# EAGLE board dev (EAGLE 4.16)

Size 100 x 48.25 mm. Coordinates in mm from the lower left corner, seen from the top.
Outline: 0,0 100,0 100,48.25 0,48.25 0,0
Copper layers (1*16): Top 0.035mm / dielectric 1.5mm / Bottom 0.035mm
Design rules "8mils": minimum track width 10mil, minimum drill 24mil, track to track 8mil, track to pad 8mil, pad to pad 8mil, via to via 8mil, smd to smd 8mil, copper to edge 40mil, drill to drill 10mil, minimum pad ring 10mil, minimum via ring 8mil, stop-mask expansion 0mil, vias tented up to drill 0mil, thermal gap 10mil

## Footprints (pad centres in the part's own frame; a part is rotated, then mirrored left to right if it is on the bottom)
SOT223 = smd 1.219 x 2.235: 1 -2.311,-3.099; 2 0,-3.099; 3 2.311,-3.099 | smd 3.6 x 2.2: 4 0,3.099
C0603 = smd 1.1 x 1: 1 -0.85,0; 2 0.85,0
C1206 = smd 1.6 x 1.8: 1 -1.4,0; 2 1.4,0
SOD80C = smd 1.4 x 1.8: A 1.7,0; C -1.7,0
TQFP32-08 = smd 1.27 x 0.559: 1 -4.293,2.8; 2 -4.293,2; 3 -4.293,1.2; 4 -4.293,0.4; 5 -4.293,-0.4; 6 -4.293,-1.2; 7 -4.293,-2; 8 -4.293,-2.8; 17 4.293,-2.8; 18 4.293,-2; 19 4.293,-1.2; 20 4.293,-0.4; 21 4.293,0.4; 22 4.293,1.2; 23 4.293,2; 24 4.293,2.8 | smd 0.559 x 1.27: 9 -2.8,-4.293; 10 -2,-4.293; 11 -1.2,-4.293; 12 -0.4,-4.293; 13 0.4,-4.293; 14 1.2,-4.293; 15 2,-4.293; 16 2.8,-4.293; 25 2.8,4.293; 26 2,4.293; 27 1.2,4.293; 28 0.4,4.293; 29 -0.4,4.293; 30 -1.2,4.293; 31 -2,4.293; 32 -2.8,4.293
SOICW54 = smd 0.3 x 2: 1 0.5,-1.1; 2 1.15,-1.1; 3 1.8,-1.1; 4 2.45,-1.1; 5 3.1,-1.1; 6 3.75,-1.1; 7 4.4,-1.1; 8 5.05,-1.1; 9 5.7,-1.1; 10 6.35,-1.1; 11 7,-1.1; 12 7.65,-1.1; 13 8.3,-1.1; 14 8.95,-1.1; 15 9.6,-1.1; 16 10.25,-1.1; 17 10.9,-1.1; 18 11.55,-1.1; 19 12.2,-1.1; 20 12.85,-1.1; 21 13.5,-1.1; 22 14.15,-1.1; 23 14.8,-1.1; 24 15.45,-1.1; 25 16.1,-1.1; 26 16.75,-1.1; 27 17.4,-1.1; 28 17.4,8.6; 29 16.75,8.6; 30 16.1,8.6; 31 15.45,8.6; 32 14.8,8.6; 33 14.15,8.6; 34 13.5,8.6; 35 12.85,8.6; 36 12.2,8.6; 37 11.55,8.6; 38 10.9,8.6; 39 10.25,8.6; 40 9.6,8.6; 41 8.95,8.6; 42 8.3,8.6; 43 7.65,8.6; 44 7,8.6; 45 6.35,8.6; 46 5.7,8.6; 47 5.05,8.6; 48 4.4,8.6; 49 3.75,8.6; 50 3.1,8.6; 51 2.45,8.6; 52 1.8,8.6; 53 1.15,8.61; 54 0.5,8.6 | smd 10.3 x 5: P$55 8.75,3.75
SSOP28 = smd 0.4 x 1.5: 1 -4.225,-3.625; 2 -3.575,-3.625; 3 -2.925,-3.625; 4 -2.275,-3.625; 5 -1.625,-3.625; 6 -0.975,-3.625; 7 -0.325,-3.625; 8 0.325,-3.625; 9 0.975,-3.625; 10 1.625,-3.625; 11 2.275,-3.625; 12 2.925,-3.625; 13 3.575,-3.625; 14 4.225,-3.625; 15 4.225,3.625; 16 3.575,3.625; 17 2.925,3.625; 18 2.275,3.625; 19 1.625,3.625; 20 0.975,3.625; 21 0.325,3.625; 22 -0.325,3.625; 23 -0.975,3.625; 24 -1.625,3.625; 25 -2.275,3.625; 26 -2.925,3.625; 27 -3.575,3.625; 28 -4.225,3.625
SO08 = smd 0.6 x 2.2: 1 -1.905,-2.6; 2 -0.635,-2.6; 3 0.635,-2.6; 4 1.905,-2.6; 5 1.905,2.6; 6 0.635,2.6; 7 -0.635,2.6; 8 -1.905,2.6
SPC4078 = drill 0.8 pad 2.184 long: 1 -3,0; 2 0,-4.8 | drill 1 pad 2.184 long: 3 3,0
2X03 = drill 1.016 octagon: 1 -2.54,-1.27; 2 -2.54,1.27; 3 0,-1.27; 4 0,1.27; 5 2.54,-1.27; 6 2.54,1.27
1X03 = drill 1.016 long: 1 -2.54,0; 2 0,0; 3 2.54,0
1X02 = drill 1.016 long: 1 -1.27,0; 2 1.27,0
2X13 = drill 1.016 octagon: 1 -15.24,-1.27; 2 -15.24,1.27; 3 -12.7,-1.27; 4 -12.7,1.27; 5 -10.16,-1.27; 6 -10.16,1.27; 7 -7.62,-1.27; 8 -7.62,1.27; 9 -5.08,-1.27; 10 -5.08,1.27; 11 -2.54,-1.27; 12 -2.54,1.27; 13 0,-1.27; 14 0,1.27; 15 2.54,-1.27; 16 2.54,1.27; 17 5.08,-1.27; 18 5.08,1.27; 19 7.62,-1.27; 20 7.62,1.27; 21 10.16,-1.27; 22 10.16,1.27; 23 12.7,-1.27; 24 12.7,1.27; 25 15.24,-1.27; 26 15.24,1.27
2X08 = drill 1.016 octagon: 1 -8.89,-1.27; 2 -8.89,1.27; 3 -6.35,-1.27; 4 -6.35,1.27; 5 -3.81,-1.27; 6 -3.81,1.27; 7 -1.27,-1.27; 8 -1.27,1.27; 9 1.27,-1.27; 10 1.27,1.27; 11 3.81,-1.27; 12 3.81,1.27; 13 6.35,-1.27; 14 6.35,1.27; 15 8.89,-1.27; 16 8.89,1.27
CHIPLED_0603 = smd 0.8 x 0.8: A 0,-0.75; C 0,0.75
05P = drill 0.914 long: 1 -5.08,0; 2 -2.54,0; 3 0,0; 4 2.54,0; 5 5.08,0
HC49/S = drill 0.813 round: 1 -2.413,0; 2 2.413,0
R0603 = smd 1 x 1.1: 1 -0.85,0; 2 0.85,0
RTRIM3214W = smd 1.3 x 1.6: 1 -1.275,-1.45; 3 1.275,-1.45 | smd 2 x 1.6: 2 0,1.45
USB_MINI_B = smd 2.286 x 0.508: P$1 1.14,1.6; P$2 1.14,0.8; P$3 1.14,0; P$4 1.14,-0.8; P$5 1.14,-1.6 | hole 1.016: -1.2,2.2; -1.2,-2.2

## Placement (x,y rotation side)
B_CH1  BSP75N  [SOT223]  16.98,10.79 0 top
C1  30pF  [C0603]  41.11,5.71 270 top
C2  30pF  [C0603]  41.11,9.52 90 top
C3  0.1uF  [C0603]  55.08,18.41 180 top
C4  10nF  [C0603]  80.48,4.44 180 top
C5  47pF  [C0603]  84.29,4.44 180 top
C6  47pF  [C0603]  80.48,9.52 180 top
C7  100nF  [C0603]  80.48,6.98 0 top
C8  100nF  [C0603]  84.29,6.98 180 top
C9  4.7uF  [C1206]  72.86,3.17 0 top
C10  10nF  [C0603]  79.21,37.46 270 top
C11  0.1uF  [C0603]  62.7,10.79 90 top
C12  10nF  [C0603]  76.67,37.46 270 top
C13  10nF  [C0603]  74.13,37.46 270 top
C14  10nF  [C0603]  71.59,37.46 270 top
C15  10nF  [C0603]  69.05,37.46 270 top
C16  10nF  [C0603]  66.51,37.46 270 top
C17  10nF  [C0603]  63.97,37.46 270 top
C18  10nF  [C0603]  61.43,37.46 270 top
C19  10nF  [C0603]  58.89,37.46 270 top
C20  10nF  [C0603]  56.35,37.46 270 top
C21  56pF  [C0603]  56.35,32.38 0 top
C22  10nF  [C0603]  79.21,32.38 0 top
C23  4.7uF  [C1206]  80.48,29.84 0 top
C24  10nF  [C0603]  79.21,24.76 180 top
C25  4.7uF  [C1206]  80.48,27.3 180 top
C26  10nF  [C0603]  79.21,22.22 0 top
C27  10nF  [C0603]  52.54,28.57 180 top
C28  1nF  [C0603]  52.54,23.49 180 top
C29  10nF  [C0603]  30.95,20.95 0 top
C30  0.1uF  [C0603]  30.95,26.03 0 top
C31  10pF  [C0603]  52.54,32.38 90 top
C207  0.1uF  [C0603]  50,12.06 270 top
D1  BZV55-B5V1  [SOD80C]  32.22,28.57 0 top
G_CH1  BSP75N  [SOT223]  24.6,10.79 0 top
IC1  MEGA8-AI  [TQFP32-08]  56.35,12.06 0 top
IC2  MC33794  [SOICW54]  58.89,23.49 0 top
IC3  FT232RL  [SSOP28]  72.86,10.79 270 top
IC4  LM358D  [SO08]  22.06,22.22 180 top
J1  [SPC4078]  88.1,22.22 180 top
JP1  MISO  [2X03]  56.35,3.17 180 top
JP2  [1X03]  56.35,26.03 270 top
JP3  [1X03]  36.03,20.95 90 top
JP4  [1X02]  65.24,3.17 0 top
JP5  [2X13]  69.05,42.54 180 top
JP6  [2X08]  3.01,17.14 90 top
LED_GREEN  [CHIPLED_0603]  83.02,14.6 180 top
LED_RED  [CHIPLED_0603]  85.56,14.6 180 top
LM1  [05P]  24.6,3.17 180 top
Q1  16MHz  [HC49/S]  44.92,6.98 90 top
R1  47k  [R0603]  88.1,31.11 90 top
R2  39k  [R0603]  85.56,31.11 90 top
R3  100k  [RTRIM3214W]  15.71,24.76 180 top
R4  2k2  [R0603]  32.22,31.11 0 top
R5  2k2  [R0603]  30.95,23.49 180 top
R6  10k  [R0603]  27.14,26.03 180 top
R7  100k  [RTRIM3214W]  15.71,19.68 180 top
R8  10k  [R0603]  27.14,18.41 0 top
R9  1k  [R0603]  50,3.17 270 top
R10  10k  [R0603]  27.14,20.95 180 top
R11  270R  [R0603]  84.29,12.06 0 top
R12  270R  [R0603]  84.29,9.52 0 top
R13  10k  [R0603]  30.95,18.41 0 top
R14  680  [R0603]  27.14,23.49 180 top
R_CH1  BSP75N  [SOT223]  32.22,10.79 0 top
U$8  USB_MINI_B  [USB_MINI_B]  90.64,9.52 180 top

## Library data of the parts
B_CH1 G_CH1 R_CH1 = my-library
C1-C31 C207 R1-R14 = rcl
D1 = diode
IC1 = atmel
IC2 = mc33794
IC3 = ftdichip
IC4 = linear
J1 = con-jack
JP1-JP6 = pinhead
LED_GREEN LED_RED = led
LM1 = con-amp-quick
Q1 = crystal
U$8 = mgs

## Nets
+3V3: C7.2 IC3.17
+5V: C4.1 C8.1 C9.1 IC3.4 IC3.20 JP4.1 R11.2 R12.2 U$8.P$1
+12V: C26.2 C30.1 IC2.27 IC4.8 J1.3 LM1.1
A: IC1.23 IC2.14
B: IC1.24 IC2.13
C: IC1.25 IC2.12
D: IC1.26 IC2.11
GND: B_CH1.3 C1.1 C2.1 C3.2 C4.2 C5.2 C6.2 C7.1 C8.2 C9.2 C11.2 C21.1 C22.2 C23.2 C24.1 C25.1 C26.1 C27.2 C28.2 C29.2 C30.2 C31.1 C207.1 D1.A G_CH1.3 IC1.3 IC1.5 IC1.21 IC2.4 IC2.29 IC2.32 IC2.35 IC3.7 IC3.18 IC3.21 IC3.25 IC3.26 IC4.4 J1.1 J1.2 JP1.6 R2.1 R5.1 R_CH1.3 U$8.P$5
LEVEL: IC2.16 JP3.3 R6.1
LEVEL_AMP: D1.C JP3.1 R14.2
MISO: IC1.16 JP1.1
MOSI_PWM_B_CH1: B_CH1.1 IC1.15 JP1.4
N$1: C2.2 IC1.7 Q1.2
N$2: C1.2 IC1.8 Q1.1
N$3: C10.2 IC2.36
N$4: C12.2 IC2.37
N$5: C13.2 IC2.38
N$6: LM1.2 R_CH1.2
N$7: G_CH1.2 LM1.3
N$8: B_CH1.2 LM1.4
N$9: C14.2 IC2.39
N$10: IC3.22 LED_GREEN.C
N$11: LED_GREEN.A R12.1
N$12: LED_RED.A R11.1
N$13: IC3.23 LED_RED.C
N$14: C15.2 IC2.40
N$15: C16.2 IC2.41
N$16: C17.2 IC2.42
N$17: C18.2 IC2.43
N$18: C19.2 IC2.44
N$19: C20.2 C31.2 IC2.45
N$20: C21.2 IC2.46
N$21: IC2.2 IC2.24
N$22: IC2.19 R2.2
N$23: C10.1 JP5.5
N$24: IC2.1 IC2.10 R1.2
N$25: C24.2 C25.2 IC2.26
N$26: C28.1 JP2.1
N$27: C27.1 JP2.3
N$28: IC2.18 JP2.2
N$29: IC1.22 JP3.2
N$30: R7.2 R7.3 R8.1
N$31: R3.1 R5.2
N$32: R3.3 R4.1
N$33: C29.1 IC4.3 IC4.5 R3.2
N$34: IC4.2 R6.2 R7.1
N$35: IC4.1 R8.2 R10.1
N$36: C12.1 JP5.7
N$37: IC4.6 R10.2 R13.1
N$38: IC4.7 R13.2 R14.1
N$39: C13.1 JP5.9
N$40: C14.1 JP5.11
N$41: C15.1 JP5.13
N$42: C16.1 JP5.15
N$43: C17.1 JP5.17
N$44: C18.1 JP5.19
N$45: C19.1 JP5.21
N$46: C20.1 JP5.23
N$47: IC2.30 JP5.1 JP5.2 JP5.3 JP5.4 JP5.6 JP5.8 JP5.10 JP5.12 JP5.14 JP5.16 JP5.18 JP5.20 JP5.22 JP5.24 JP5.25 JP5.26
PWM_G_CH1: G_CH1.1 IC1.14
PWM_R_CH1: IC1.13 R_CH1.1
RST: C3.1 IC1.29 JP1.5 R9.1
RXD: IC1.31 IC3.5
SCK: IC1.17 JP1.3
TXD: IC1.30 IC3.1
USBDM: C6.1 IC3.16 U$8.P$2
USBDP: C5.1 IC3.15 U$8.P$3
UV_CH1: LM1.5
VCC: C11.1 C22.1 C23.1 C207.2 IC1.4 IC1.6 IC1.18 IC2.28 JP1.2 JP4.2 R1.1 R4.2 R9.2

## Tracks (layer width: path | path; a pad name or v marks a point on that pad's centre or on a via)
+3V3  (1 unrouted)
+5V  (8 unrouted)
+12V  (5 unrouted)
A  (1 unrouted)
B  (1 unrouted)
C  (1 unrouted)
D  (1 unrouted)
GND  (44 unrouted)
LEVEL  (2 unrouted)
LEVEL_AMP  (2 unrouted)
MISO  (1 unrouted)
MOSI_PWM_B_CH1  (2 unrouted)
N$1  (2 unrouted)
N$2  (2 unrouted)
N$3  (1 unrouted)
N$4  (1 unrouted)
N$5  (1 unrouted)
N$6  (1 unrouted)
N$7  (1 unrouted)
N$8  (1 unrouted)
N$9  (1 unrouted)
N$10  (1 unrouted)
N$11  (1 unrouted)
N$12  (1 unrouted)
N$13  (1 unrouted)
N$14  (1 unrouted)
N$15  (1 unrouted)
N$16  (1 unrouted)
N$17  (1 unrouted)
N$18  (1 unrouted)
N$19  (2 unrouted)
N$20  (1 unrouted)
N$21  (1 unrouted)
N$22  (1 unrouted)
N$23  (1 unrouted)
N$24  (2 unrouted)
N$25  (2 unrouted)
N$26  (1 unrouted)
N$27  (1 unrouted)
N$28  (1 unrouted)
N$29  (1 unrouted)
N$30  (2 unrouted)
N$31  (1 unrouted)
N$32  (1 unrouted)
N$33  (3 unrouted)
N$34  (2 unrouted)
N$35  (2 unrouted)
N$36  (1 unrouted)
N$37  (2 unrouted)
N$38  (2 unrouted)
N$39  (1 unrouted)
N$40  (1 unrouted)
N$41  (1 unrouted)
N$42  (1 unrouted)
N$43  (1 unrouted)
N$44  (1 unrouted)
N$45  (1 unrouted)
N$46  (1 unrouted)
N$47  (16 unrouted)
PWM_G_CH1  (1 unrouted)
PWM_R_CH1  (1 unrouted)
RST  (3 unrouted)
RXD  (1 unrouted)
SCK  (1 unrouted)
TXD  (1 unrouted)
USBDM  (2 unrouted)
USBDP  (2 unrouted)
VCC  (12 unrouted)